# EAGLE board CAM_BOARD_V1_X v17 (EAGLE 9.7.0)
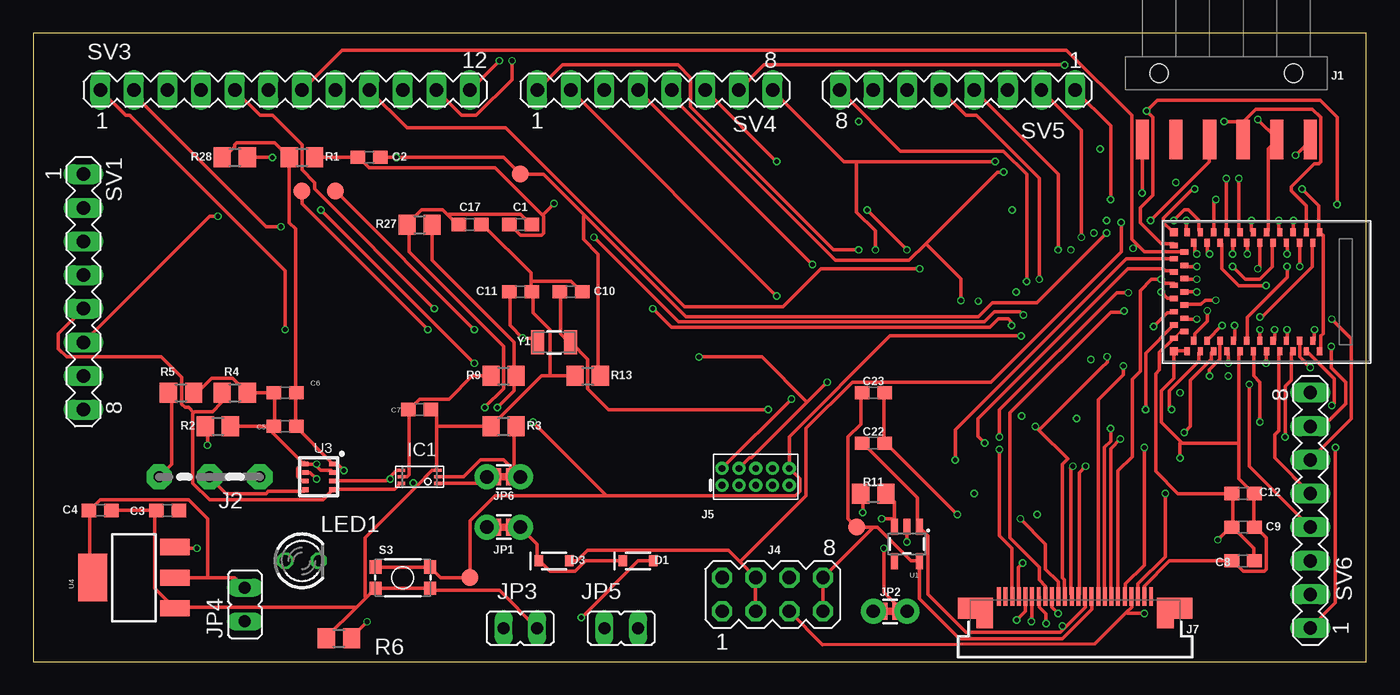
[diagram p0: board, top side]
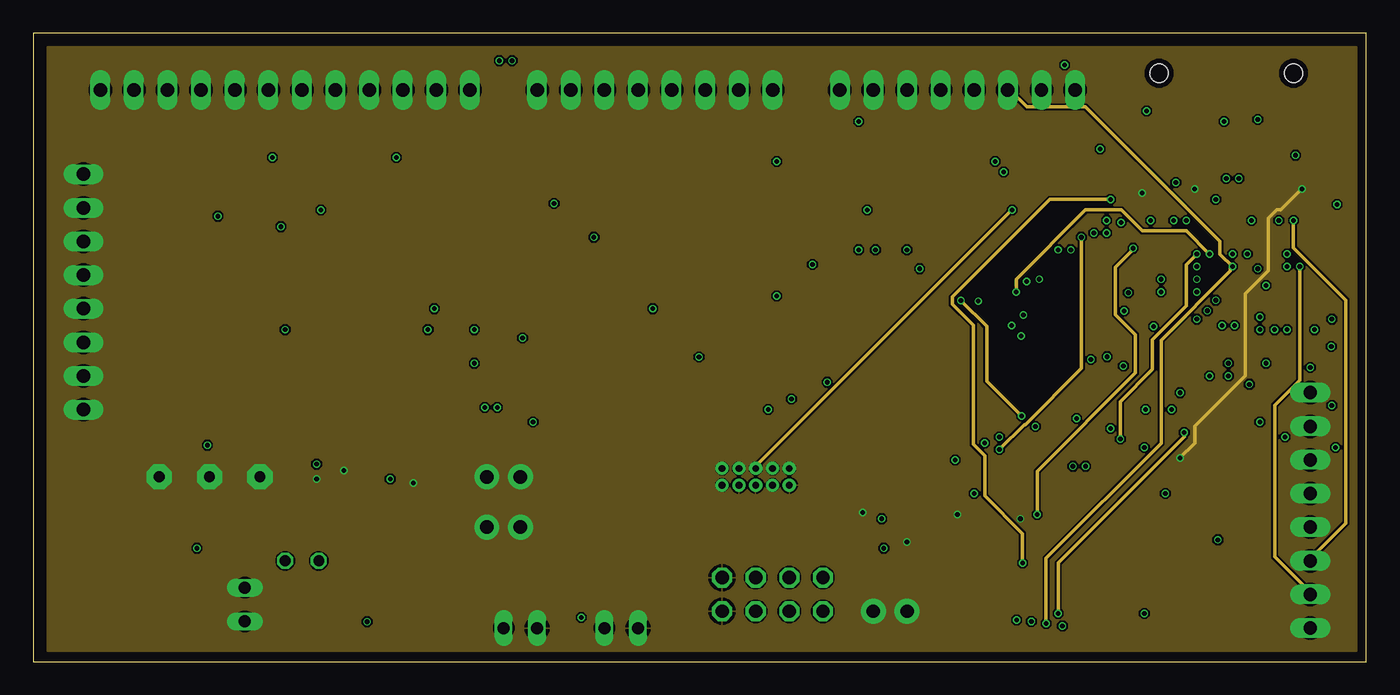
[diagram p1: board, inner layer GND]
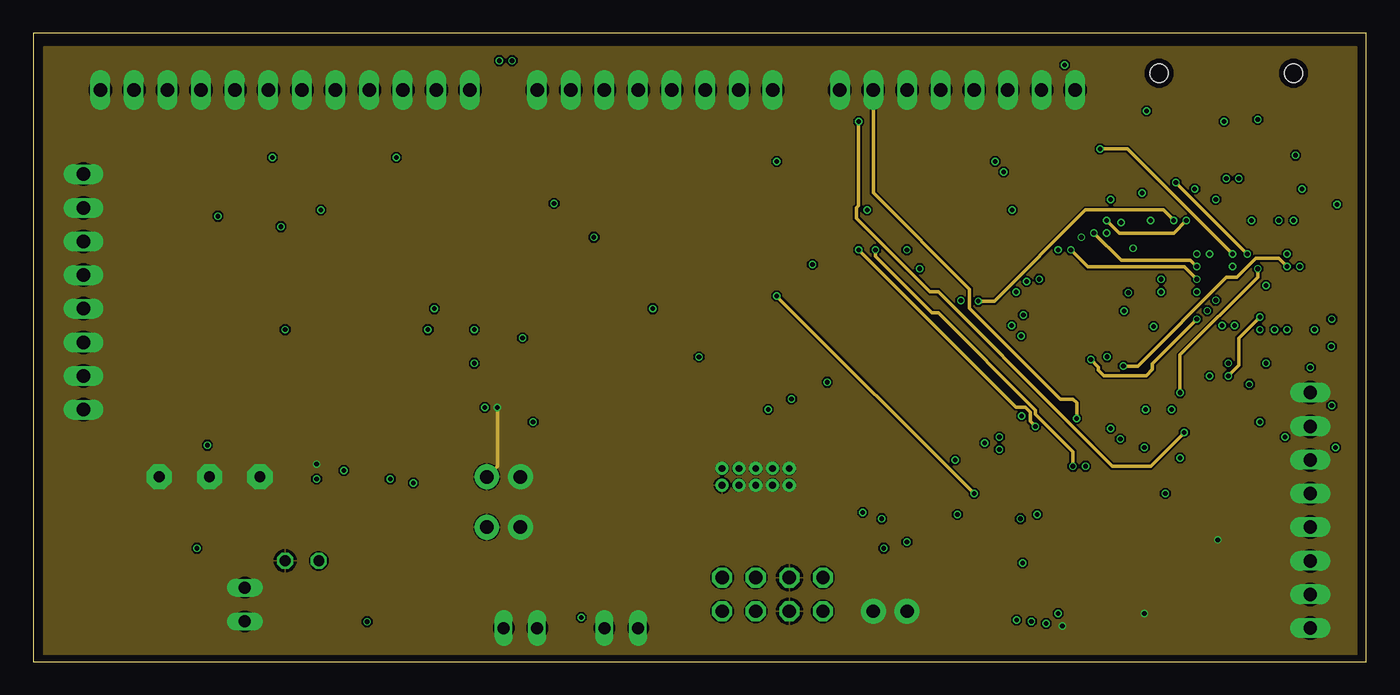
[diagram p2: board, inner layer VDD]
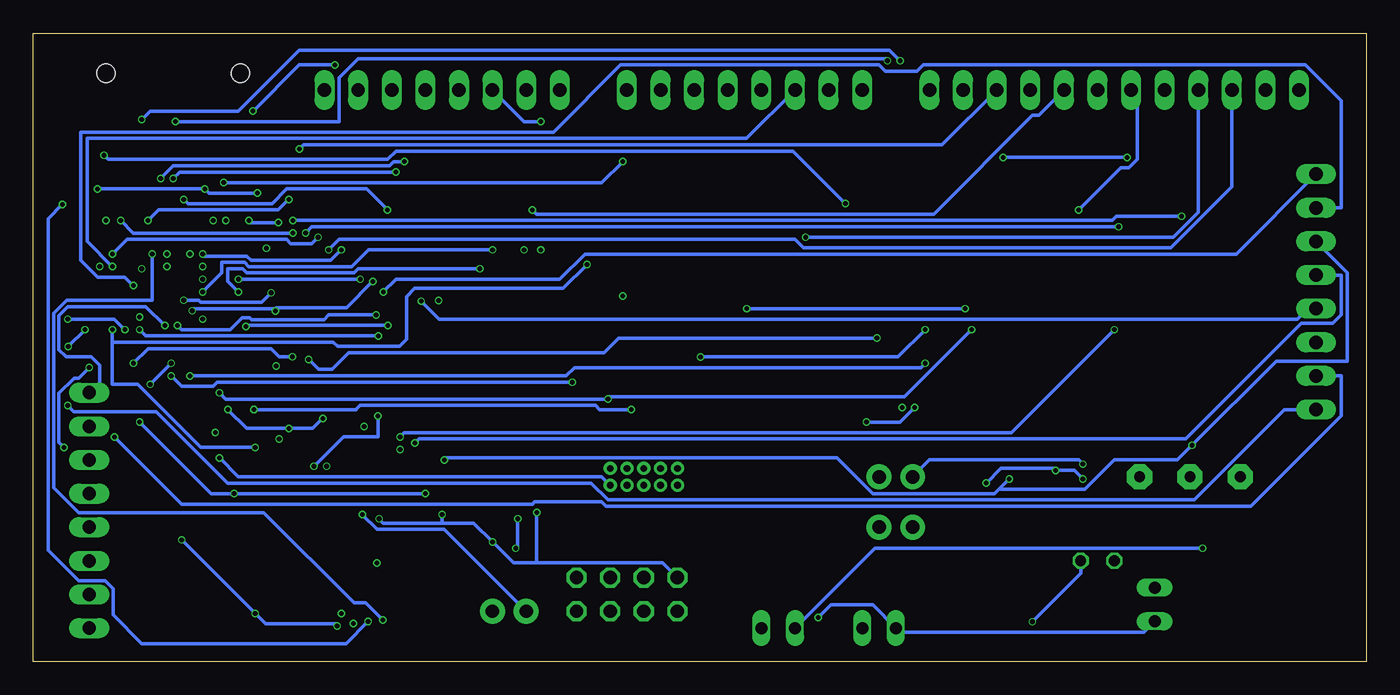
[diagram p3: board, bottom side, seen from below]

Size 100.76 x 47.49 mm. Coordinates in mm from the lower left corner, seen from the top.
Outline: 0,0 100.76,0 100.76,47.49 0,47.49 0,0
Copper layers (1*2*15*16): Top / GND / VDD / Bottom
Stack-up Default Layer Stack: Top User Defined 0.035559375mm / Dielectric-2 User Defined 0.17018125mm / GND User Defined 0.01778125mm / Dielectric-1 User Defined 1.1938mm / VDD User Defined 0.01778125mm / Dielectric-3 User Defined 0.17018125mm / Bottom User Defined 0.035559375mm
Design rules "oshpark-4layer": minimum track width 5mil, minimum drill 10mil, track to track 5mil, track to pad 5mil, pad to pad 5mil, via to via 5mil, smd to smd 5mil, copper to edge 15mil, drill to drill 6mil, minimum pad ring 4mil, minimum via ring 4mil, stop-mask expansion 1.5mil, vias tented up to drill 0mil, thermal gap 10mil

## Footprints (pad centres in the part's own frame; a part is rotated, then mirrored left to right if it is on the bottom)
C0603 = smd 1.1 x 1: 1 -0.85,0; 2 0.85,0
SOD-323 = smd 0.63 x 0.83: A 1.15,0; C -1.15,0
WSOF-6 = smd 0.55 x 0.25: 1 -1.375,0.5; 2 -1.375,0; 3 -1.375,-0.5; 4 1.375,-0.5; 5 1.375,0; 6 1.375,0.5
1X06-SMD_RA_MALE = smd 1 x 3: 1 -6.35,5; 2 -3.81,5; 3 -1.27,5; 4 1.27,5; 5 3.81,5; 6 6.35,5 | hole 1.4: -5.08,0; 5.08,0
04C = drill 0.813 pad 1.905 octagon: 1 -1.905,0; 2 1.905,0; 3 5.715,0
MA04-2 = drill 1.016 octagon: 1 -3.81,-1.27; 2 -3.81,1.27; 3 -1.27,-1.27; 4 -1.27,1.27; 5 1.27,-1.27; 6 1.27,1.27; 7 3.81,-1.27; 8 3.81,1.27
2X5-PTH-1.27MM = drill 0.508 pad 1: 1 -2.54,-0.635; 2 -2.54,0.635; 3 -1.27,-0.635; 4 -1.27,0.635; 5 0,-0.635; 6 0,0.635; 7 1.27,-0.635; 8 1.27,0.635; 9 2.54,-0.635; 10 2.54,0.635
FPC-24-AMPHENOL-SFV24R-1STE1HLF = smd 0.3 x 1.4: 1 5.75,2.4; 2 5.25,2.4; 3 4.75,2.4; 4 4.25,2.4; 5 3.75,2.4; 6 3.25,2.4; 7 2.75,2.4; 8 2.25,2.4; 9 1.75,2.4; 10 1.25,2.4; 11 0.75,2.4; 12 0.25,2.4; 13 -0.25,2.4; 14 -0.75,2.4; 15 -1.25,2.4; 16 -1.75,2.4; 17 -2.25,2.4; 18 -2.75,2.4; 19 -3.25,2.4; 20 -3.75,2.4; 21 -4.25,2.4; 22 -4.75,2.4; 23 -5.25,2.4; 24 -5.75,2.4 | smd 1.4 x 1.6: MNT1@0 -8.15,1.5; MNT2@1 8.15,1.5 | smd 1.25 x 2.3: MNT1@1 -6.825,1.15; MNT2@0 6.825,1.15
COMBO-JUMPER_2_NC_TRACE = smd 0.635 x 1.27: 1 -0.508,0; 2 0.508,0 | drill 1.016 pad 1.88: 3 -1.27,0; 4 1.27,0
JP1 = drill 0.914 long: 1 0,-1.27; 2 0,1.27
LED3MM = drill 0.813 octagon: A -1.27,0; K 1.27,0
R0805 = smd 1.3 x 1.5: 1 -0.95,0; 2 0.95,0
TACTILE_SWITCH_SMD_4.6X2.8MM = smd 0.9 x 1: 1 -2.05,-0.8; 2 2.05,-0.8; 3 2.05,0.8; 4 -2.05,0.8
MA08-1 = drill 1.016 long: 1 -8.89,0; 2 -6.35,0; 3 -3.81,0; 4 -1.27,0; 5 1.27,0; 6 3.81,0; 7 6.35,0; 8 8.89,0
MA12-1 = drill 1.016 long: 1 -13.97,0; 2 -11.43,0; 3 -8.89,0; 4 -6.35,0; 5 -3.81,0; 6 -1.27,0; 7 1.27,0; 8 3.81,0; 9 6.35,0; 10 8.89,0; 11 11.43,0; 12 13.97,0
PAD.03X.05 = smd 1.27 x 1.27: P$1 0,0
SOT23-5 = smd 0.55 x 1.2: 1 -0.95,-1.3; 2 0,-1.3; 3 0.95,-1.3; 4 0.95,1.3; 5 -0.95,1.3
ARTEMIS_FP = smd 0.4 x 0.6: AD16 -4,-3.7; BOOT 1.5,4.5; D0 0.5,-4.5; D1 -0.5,-4.5; D2 -1,-3.7; D3 2,-3.7; D7 -1.5,4.5; D8 -0.5,4.5; D9 2,3.7; D10 1,3.7; D14 -5,3.7; D17 -3.5,-4.5; D36 2.5,-4.5; D38 3,-3.7; D40 2.5,4.5; D41 -2.5,-4.5; GND@1 4.5,4.5; GND@39 -5.5,-4.5; GND@47 -1.5,-4.5; GND@59 4.5,-4.5; RXI-0 3.5,4.5; SWDCK 4,3.7; SWDIO 0,3.7; TXO-0 0.5,4.5; ~AD31 -3,-3.7; ~AD35 -2,3.7; ~D4 -2.5,4.5; ~D5 -1,3.7; ~D18 -4.5,-4.5; ~D19 -5,-3.7; ~D22 -3.5,4.5; ~D23 -4,3.7; ~D24 -3,3.7; ~D27 -4.5,4.5; ~D28 -5.5,4.5; ~D37 3.5,-4.5; ~D39 3,3.7; ~D42 1.5,-4.5; ~D43 1,-3.7; ~D44 4,-3.7; ~D45 -2,-3.7; ~RST 0,-3.7 | smd 0.6 x 0.4: AD34 -6.5,-0.5; D15 -6.5,0.5; VDD@36 -5.7,-3; VDD@37 -6.5,-3.5; XI -6.5,-2.5; XO -5.7,-2; ~AD11 -5.7,-1; ~AD12 -5.7,2; ~AD13 -5.7,1; ~AD29 -6.5,-1.5; ~AD32 -5.7,3; ~AD33/SWO -5.7,0; ~D6 -6.5,3.5; ~D25 -6.5,2.5; ~D26 -6.5,1.5 | smd 0.6 x 0.6: GND@22 -6.5,4.5; GND@38 -6.5,-4.5
BME280_LGA = smd 0.5 x 0.35: P$1 1.025,0.975; P$2 1.025,0.325; P$3 1.025,-0.325; P$4 1.025,-0.975; P$5 -1.025,-0.975; P$6 -1.025,-0.325; P$7 -1.025,0.325; P$8 -1.025,0.975
SOT223 = smd 1.219 x 2.235: 1 -2.311,-3.099; 2 0,-3.099; 3 2.311,-3.099 | smd 3.6 x 2.2: 4 0,3.099
CRYSTAL-SMD-3.2X1.5MM = smd 1 x 1.8: P$1 -1.25,0; P$2 1.25,0

## Placement (x,y rotation side)
C1  0.1uF  [C0603]  36.83,33.02 0 top
C2  0.1uF  [C0603]  25.4,38.1 0 top
C3  10uF  [C0603]  10.16,11.43 180 top
C4  10uF  [C0603]  5.08,11.43 0 top
C5  0.1uF  [C0603]  19.05,17.78 0 top
C6  0.1uF  [C0603]  19.05,20.32 0 top
C7  1uF  [C0603]  29.21,19.05 0 top
C8  0.1uF  [C0603]  91.44,7.62 180 top
C9  10uF  [C0603]  91.44,10.16 0 top
C10  15pF  [C0603]  40.64,27.94 0 top
C11  15pF  [C0603]  36.83,27.94 0 top
C12  1.0uF  [C0603]  91.44,12.7 0 top
C17  1nF  [C0603]  33.02,33.02 0 top
C22  1.0uF  [C0603]  63.5,16.51 0 top
C23  1.0uF  [C0603]  63.5,20.32 0 top
D1  1A/23V/620mV  [SOD-323]  45.72,7.62 0 top
D3  1A/23V/620mV  [SOD-323]  39.37,7.62 0 top
IC1  BH1750  [WSOF-6]  29.21,13.97 180 top
J1  [1X06-SMD_RA_MALE]  90.17,44.45 180 top
J2  [04C]  15.24,13.97 180 top
J4  [MA04-2]  55.88,5.08 0 top
J5  CORTEX_DEBUG  [2X5-PTH-1.27MM]  54.61,13.97 0 top
J7  CAMERA-HIMAX BOTTOM-CONTACT  [FPC-24-AMPHENOL-SFV24R-1STE1HLF]  78.74,2.54 0 top
JP1  JUMPER  [COMBO-JUMPER_2_NC_TRACE]  35.56,10.16 180 top
JP2  JUMPER  [COMBO-JUMPER_2_NC_TRACE]  64.77,3.81 0 top
JP3  [JP1]  36.83,2.54 90 top
JP4  [JP1]  16,4.32 0 top
JP5  [JP1]  44.45,2.54 90 top
JP6  JUMPER  [COMBO-JUMPER_2_NC_TRACE]  35.56,13.97 180 top
LED1  [LED3MM]  20.32,7.62 0 top
R1  100k  [R0805]  20.32,38.1 0 top
R2  4.7k  [R0805]  13.97,17.78 0 top
R3  10k  [R0805]  35.56,17.78 0 top
R4  4.7k  [R0805]  15.24,20.32 0 top
R5  4.7k  [R0805]  11.18,20.32 0 top
R6  10k  [R0805]  23.11,1.78 0 top
R9  1k  [R0805]  35.56,21.59 0 top
R11  100k  [R0805]  63.5,12.7 0 top
R13  10k  [R0805]  41.91,21.59 0 top
R27  100k  [R0805]  29.21,33.02 0 top
R28  220k  [R0805]  15.24,38.1 0 top
S3  RESET  [TACTILE_SWITCH_SMD_4.6X2.8MM]  27.94,6.35 0 top
SV1  [MA08-1]  3.81,27.94 270 top
SV3  [MA12-1]  19.05,43.18 0 top
SV4  [MA08-1]  46.99,43.18 0 top
SV5  [MA08-1]  69.85,43.18 180 top
SV6  [MA08-1]  96.52,11.43 90 top
TP1  [PAD.03X.05]  22.86,35.56 0 top
TP2  [PAD.03X.05]  20.32,35.56 0 top
TP4  TEST-POINT3X5  [PAD.03X.05]  36.83,36.83 0 top
TP6  TEST-POINT3X5  [PAD.03X.05]  33.02,6.35 0 top
TP7  TEST-POINT3X5  [PAD.03X.05]  62.23,10.16 0 top
U1  1.8V  [SOT23-5]  66.04,8.89 180 top
U2  ARTEMIS_MODULESMD  [ARTEMIS_FP]  92.71,27.94 0 top
U3  BME280  [BME280_LGA]  21.59,13.97 0 top
U4  LM1117-3.3  [SOT223]  7.62,6.35 90 top
Y1  32.768kHz  [CRYSTAL-SMD-3.2X1.5MM]  39.37,24.13 0 top

## Library data of the parts
C1-C12 C17 C22 C23 = rcl; SPICEPREFIX: C
D1 D3 = SparkFun-DiscreteSemi; PROD_ID: DIO-11623
IC1 = microbuilder
J1 = SparkFun-Connectors; PROD_ID: CONN-08971
J2 JP3-JP5 = jumper
J4 SV1 SV3-SV6 = con-lstb; OC_FARNELL: unknown; OC_NEWARK: unknown
J5 TP1 TP2 TP4 TP6 TP7 = SparkFun-Connectors
J7 = SparkFun-Connectors; DIGIKEY: 609-4320-2-ND; PROD_ID: CONN-14233
JP1 JP2 JP6 = SparkFun-Jumpers
LED1 = led
R1-R6 R9 R11 R13 R27 R28 = rcl; SPICEPREFIX: R
S3 = SparkFun-Switches; PROD_ID: SWCH-13065
U1 = SparkFun-IC-Power; PROD_ID: VREG-14239
U2 = SparkFun-IC-Microcontroller; PROD_ID: SUB-14479
U3 = BME280ComponentLibrary; PROD_ID: IC-13090
U4 = SparkFun-IC-Power; PROD_ID: VREG-08170
Y1 = SparkFun-Clocks; PROD_ID: XTAL-13062

## Nets
1.8V: C23.1 J4.7 J4.8 J7.10 TP7.P$1 U1.5
!DTR: C1.1 C2.1 J1.1 R1.2
!TGT_RST: C1.2 C17.1 J5.10 R27.1 S3.3 S3.4 TP6.P$1 U2.~RST
+5V: JP5.2 U4.3
CAMERA_D0: J7.14 SV4.1 U2.D0
CAMERA_D1: J7.3 SV4.2 U2.D1
CAMERA_D2: J7.9 SV4.3 U2.D2
CAMERA_D3: J7.5 SV4.4 U2.D3
CAMERA_D4: J7.12 SV4.5 U2.~D4
CAMERA_D5: J7.20 SV4.6 U2.~D5
CAMERA_D6: J7.19 SV4.7 U2.~D6
CAMERA_D7: J7.13 SV4.8 U2.D7
CAMERA_DVDD_EN: JP2.1 JP2.3 SV3.7 U2.~AD32
CAMERA_HSYNC: J7.16 SV5.6 U2.D17
CAMERA_INT: J7.18 SV5.3 U2.D10
CAMERA_MCLK: J7.8 SV5.7 U2.~D18
CAMERA_PCLK: J7.17 SV5.8 U2.~D19
CAMERA_TRIG: J7.7 SV5.4 U2.D14
CAMERA_VSYNC: J7.6 SV5.5 U2.D15
D13: SV3.3 U2.~AD13
D16: SV3.4 U2.AD16
D23: SV1.1 U2.~D23
D24: SV1.2 U2.~D24
D26: SV1.4 U2.~D26
D28: SV1.6 U2.~D28
D29: SV3.5 U2.~AD29
D31: SV3.6 U2.~AD31
D33: SV3.8 U2.~AD33/SWO
D34: SV3.9 U2.AD34
D35: SV3.10 U2.~AD35
D36: SV1.7 U2.D36
D37: SV1.8 U2.~D37
D38: SV6.1 U2.D38
D39: SV6.2 U2.~D39
D40: SV6.3 U2.D40
D41: SV6.4 U2.D41
D42: SV6.5 U2.~D42
D43: SV6.6 U2.~D43
D44: SV6.7 U2.~D44
D45: SV6.8 U2.~D45
FTDI_VCC: D3.A J1.4 J4.3 J4.4
GND: C3.2 C4.2 C5.2 C6.2 C7.2 C8.2 C9.2 C10.2 C11.2 C12.2 C17.2 C22.2 C23.2 IC1.3 J1.6 J4.1 J4.2 J5.3 J5.5 J5.9 J7.2 J7.15 JP3.1 JP5.1 R1.1 R3.1 R6.1 R11.1 R13.1 R28.1 S3.1 S3.2 U1.2 U2.GND@1 U2.GND@22 U2.GND@38 U2.GND@39 U2.GND@47 U2.GND@59 U3.P$1 U3.P$7 U4.1
N$1: JP2.2 JP2.4 R11.2 U1.3
N$2: C7.1 IC1.5 R9.1
N$3: IC1.2 JP6.1 JP6.3 R3.2
N$4: C4.1 JP4.2 U4.2 U4.4
N$5: J2.3 R5.1
N$7: J2.2 U3.P$5
N$8: C3.1
N$9: LED1.K R6.2
N$14: C10.1 U2.XI Y1.P$2
N$15: C11.1 U2.XO Y1.P$1
PDM_CLK: SV3.2 U2.~AD12
PDM_DATA: SV3.1 U2.~AD11
SCL: J7.21 SV5.1 U2.D8
SCL1: J2.1
SCL2: IC1.6 R4.1 SV1.5 U2.~D27 U3.P$4
SDA: J7.22 SV5.2 U2.D9
SDA2: IC1.4 R2.1 SV1.3 U2.~D25 U3.P$3
TGT_BOOT: C2.2 R13.2 R28.2 TP4.P$1 U2.BOOT
TGT_SWCLK: J5.4 TP1.P$1 U2.SWDCK
TGT_SWDIO: J5.2 TP2.P$1 U2.SWDIO
TGT_SWO: J5.6 U2.~D22
UART-RX: J1.3 SV3.11 U2.RXI-0
UART-TX: J1.2 SV3.12 U2.TXO-0
V_BATT: D1.A JP3.2 JP4.1
VDD: C5.1 C6.1 C8.1 C9.1 C12.1 C22.1 IC1.1 J4.5 J4.6 J5.1 J7.4 J7.11 JP1.2 JP1.4 JP6.2 JP6.4 LED1.A R2.2 R4.2 R5.2 R9.2 R27.2 U1.1 U2.VDD@36 U2.VDD@37 U3.P$2 U3.P$6 U3.P$8
VIN1: D1.C D3.C JP1.1 JP1.3

## Tracks (layer width: path | path; a pad name or v marks a point on that pad's centre or on a via)
1.8V
  Top 0.254: J4.7 J4.8 63.5,10.16 | C23.1 62.55,20.32 62.55,17.94 61.59,16.99 61.59,10.79 TP7.P$1 63.5,10.16 | 63.5,10.16 63.82,10.16 66.36,7.62 66.83,7.62 U1.5 66.99,7.46 66.99,4.76 70.01,1.75 77.79,1.75 80.01,3.97 80.01,4.92 J7.10
!DTR  (via drill 0.35)
  Top 0.254: R1.2 C2.1 24.61,38.1 25.4,37.31 34.92,37.31 38.5,33.73 | 38.5,33.73 38.58,33.66 38.58,32.38 38.42,32.23 36.83,32.23 36.04,33.02 C1.1 | v95.41,38.26 96.52,39.37 J1.1 | 38.5,33.73 v39.37,34.61
  Bottom 0.254: v95.41,38.26 95.09,37.94 73.98,37.94 73.34,38.58 43.34,38.58 v39.37,34.61
!TGT_RST  (via drill 0.35)
  Top 0.254: 31.35,33.73 30.96,34.13 29.37,34.13 R27.1 28.42,33.02 28.42,30.96 35.56,23.81 35.56,20.64 v34.13,19.21 | 31.35,33.73 32.07,33.02 C17.1 | C1.2 37.62,33.02 36.83,33.81 31.43,33.81 31.35,33.73 | S3.4 26.04,7.14 29.84,7.14 S3.3 30,7.14 30.8,6.35 TP6.P$1 33.02,10.64 34.92,12.54 43.34,12.54 | v92.71,25.08 U2.~RST | v74.68,24.61 64.77,24.61 57.15,16.99 J5.10 57.94,13.81 57.94,12.86 57.63,12.54 43.34,12.54 | 43.34,12.54 v37.78,18.1
  Bottom 0.254: v92.71,25.08 92.23,24.61 v74.68,24.61 | v34.13,19.21 35.24,18.1 v37.78,18.1
+5V  (via drill 0.35)
  Top 0.254: v12.38,8.57 10.79,8.57 U4.3
  Bottom 0.254: v12.38,8.57 37.15,8.57 JP5.2
CAMERA_D0  (via drill 0.35)
  Top 0.254: v93.19,22.54 93.19,23.34 U2.D0 | 76.03,17.48 80.33,21.78 80.74,22.2 81.17,22.63 v81.17,23.04 | J7.14 77.95,5.08 77.95,6.19 77.79,6.35 77.79,14.92 78.18,15.32 76.03,17.48 | SV4.1 40.01,45.09 48.74,45.09 49.69,44.13 49.69,41.91 60.48,31.11 v62.39,31.11 | 76.03,17.48 v75.74,17.76
  VDD 0.254: v75.74,17.76 75.36,18.15 75.36,18.85 74.97,19.23 74.27,19.23 v62.39,31.11
  Bottom 0.254: v93.19,22.54 92.08,23.65 82.78,23.65 82.17,23.04 v81.17,23.04
CAMERA_D1  (via drill 0.35)
  Top 0.254: v92.71,18.1 92.71,21.11 92.23,21.59 92.23,23.34 U2.D1 | v85.57,12.7 85.57,7.94 83.5,5.87 83.5,5.08 J7.3 | v56.2,27.62 SV4.2
  VDD 0.254: v71.12,12.7 v56.2,27.62
  Bottom 0.254: v92.71,18.1 87.31,12.7 v85.57,12.7 v71.12,12.7
CAMERA_D2  (via drill 0.35)
  Top 0.254: v94.77,29.84 94.77,29.05 91.76,26.04 91.76,24.29 U2.D2 | J7.9 80.49,5.08 80.49,19.78 82.4,21.69 v82.4,22.34
  VDD 0.254: v94.77,29.84 94.14,30.48 92.39,30.48 90.96,29.05 90.19,29.05 83.48,22.34 v82.4,22.34
  Bottom 0.254: v94.77,29.84 96.68,31.75 96.68,39.53 46.83,39.53 SV4.3
CAMERA_D3  (via drill 0.35)
  Top 0.254: v94.77,25.08 94.77,24.29 U2.D3 | v83.98,16.19 83.98,7.3 82.55,5.87 82.55,5.08 J7.5 | v58.9,30 SV4.4
  Bottom 0.254: 94.77,24.13 94.77,20.95 92.87,20.95 88.11,16.19 v83.98,16.19 | 94.77,24.13 v94.77,25.08 | v58.9,30 60.71,28.19 71.91,28.19 72.53,27.58 72.53,24.37 73.08,23.81 77.76,23.81 78.07,24.13 94.77,24.13
CAMERA_D4  (via drill 0.35)
  Top 0.254: v90.17,36.51 90.17,32.54 U2.~D4 | v73.34,36.99 72.87,36.99 67.47,31.59 | 67.47,31.59 66.2,30.32 60.64,30.32 48.26,42.7 SV4.5 | v79.53,14.76 79.06,14.29 79.06,5.08 J7.12 | 67.47,31.59 70.12,28.94 v70.12,27.28
  GND 0.254: v70.12,27.28 72.07,25.33 72.07,21.2 v74.7,18.57
  Bottom 0.254: v90.17,36.51 89.69,36.99 v73.34,36.99 | v79.53,14.76 77.31,16.99 74.7,16.99 v74.7,18.57
CAMERA_D5  (via drill 0.35)
  Top 0.254: v91.76,30.8 91.76,31.59 U2.~D5 | v56.2,37.78 SV4.6 | J7.20 74.99,3.81 v74.33,3.14
  VDD 0.254: v91.76,30.8 v86.36,36.2
  Bottom 0.254: v91.76,30.8 91.76,27.3 98.22,27.3 99.21,26.32 99.21,13.16 97.33,11.27 83.34,11.27 76.52,4.45 75.63,4.45 v74.33,3.14 | v56.2,37.78 57.78,36.2 v86.36,36.2
CAMERA_D6  (via drill 0.35)
  Top 0.254: v77.95,45.09 55.24,45.09 SV4.7 | U2.~D6 86.2,31.59 85.25,31.59 83.66,33.18 83.66,34.29 84.61,35.24 84.61,41.12 v84.14,41.59 84.96,42.42 97.28,42.42 98.55,41.15 v98.55,34.54 | J7.19 75.49,3.35 75.44,3.3 v75.44,3.05
  Bottom 0.254: v84.14,41.59 80.64,45.09 v77.95,45.09 | v75.44,3.05 77.11,1.38 92.56,1.38 94.72,3.53 94.72,5.51 95.33,6.12 97.31,6.12 99.62,8.43 99.62,33.48 v98.55,34.54
CAMERA_D7  (via drill 0.35)
  Top 0.254: v91.12,36.51 91.12,32.54 U2.D7 | 62.23,37.78 61.28,37.78 SV4.8 | 62.23,37.78 v72.71,37.78 | v78.58,14.76 78.42,14.61 78.42,5.08 J7.13 | v63.66,31.11 63.66,32.54 62.23,33.97 62.23,37.78
  VDD 0.254: v78.58,14.76 78.58,15.88 75.76,18.69 75.76,19.01 68.42,26.35 67.94,26.35 63.66,30.64 v63.66,31.11
  Bottom 0.254: v91.12,36.51 90.17,37.47 73.82,37.47 73.5,37.78 v72.71,37.78
CAMERA_DVDD_EN  (via drill 0.35)
  Top 0.254: JP2.3 JP2.1 | 83.47,31.46 83.03,31.91 83.03,41.27 78.11,46.2 23.34,46.2 SV3.7 | 83.47,31.46 83.24,31.23 v83.12,31.23 | U2.~AD32 86.99,30.96 83.98,30.96 83.47,31.46
  GND 0.254: v83.12,31.23 83.12,31.11 81.8,29.79 81.8,26.22 83.31,24.7 83.31,21.81 75.88,14.39 v75.88,11.11
  Bottom 0.254: JP2.3 69.69,10 74.77,10 v75.88,11.11
CAMERA_HSYNC  (via drill 0.35)
  Top 0.254: v87,17.3 87.47,17.78 87.47,21.27 89.06,22.86 89.06,23.34 U2.D17 | v77.47,3.65 76.99,4.13 76.99,4.92 J7.16
  GND 0.254: v87,17.3 87,16.99 77.47,7.46 v77.47,3.65
  VDD 0.254: v62.39,40.8 62.39,34.45 62.23,34.29 62.23,33.5 67.79,27.94 68.4,27.94 78.21,18.13 78.21,18.11 81.56,14.76 84.45,14.76 v87,17.3
  Bottom 0.254: SV5.6 63.66,40.8 v62.39,40.8
CAMERA_INT  (via drill 0.35)
  Top 0.254: v90.65,29.84 91.6,28.89 92.71,28.89 93.66,29.84 93.66,31.59 U2.D10 | v76.55,2.89 76.55,3.64 76.06,4.13 76.06,4.87 J7.18
  GND 0.254: SV5.3 73.82,43.18 75.09,41.91 79.53,41.91 89.69,31.75 89.69,30.8 v90.65,29.84 90.49,29.84 90.49,29.53 85.25,24.29 85.25,16.51 76.55,7.81 v76.55,2.89
CAMERA_MCLK  (via drill 0.35)
  Top 0.254: v86.04,19.05 85.88,19.21 85.88,20.48 88.11,22.7 88.11,23.34 U2.~D18 | J7.8 80.96,5.08 80.96,16.2 81.44,16.67 v81.44,17.62
  VDD 0.254: v78.87,18.38 78.87,19.56 78.58,19.84 77.64,19.84 70.78,26.71 70.78,28.14 63.5,35.41 SV5.7
  Bottom 0.254: v86.04,19.05 84.61,17.62 v81.44,17.62 79.63,17.62 v78.87,18.38
CAMERA_PCLK  (via drill 0.35)
  Top 0.254: v88.74,26.51 88.74,25.72 87.79,24.77 87.79,24.29 U2.~D19 | J7.17 76.52,5.08 76.52,5.71 76.04,6.19 76.04,7.14 73.82,9.37 73.82,18.8 81.44,26.42 82.38,26.42 v82.45,26.49 | SV5.8 65.56,38.58 73.34,38.58 75.09,36.83 v75.09,28.73
  Bottom 0.254: v88.74,26.51 88.58,26.67 82.45,26.67 | v82.45,26.49 82.45,26.67 | 82.45,26.67 82.39,26.74 77.08,26.74 v75.09,28.73
CAMERA_TRIG  (via drill 0.35)
  Top 0.254: v87.95,30.8 87.79,30.96 87.79,31.59 U2.D14 | v77.47,31.11 77.47,36.83 SV5.4 | v82.17,16.83 81.44,16.1 81.44,5.08 J7.7
  GND 0.254: v87.95,30.8 87.15,30 87.15,26.87 84.59,24.32 84.59,22.08 82.17,19.65 v82.17,16.83
  Bottom 0.254: v87.95,30.8 87.79,30.64 84.61,30.64 84.3,30.32 78.26,30.32 v77.47,31.11
CAMERA_VSYNC  (via drill 0.35)
  Top 0.254: v76.04,28.89 76.04,36.51 71.28,41.27 70.48,41.27 SV5.5 | U2.D15 86.2,28.57 85.57,28.57 v85.25,28.89 84.52,28.89 83.67,28.04 83.67,21.95 83.06,21.34 83.06,15.49 81.99,14.43 J7.6
  Bottom 0.254: v76.04,28.89 v85.25,28.89
D13  (via drill 0.35)
  Top 0.254: v87.95,28.89 87.15,28.89 U2.~AD13
  VDD 0.254: v87.95,28.89 87,29.84 79.69,29.84 v78.42,31.11
  Bottom 0.254: v78.42,31.11 77.63,31.91 43.18,31.91 42.55,31.27 14.76,31.27 10.16,35.88 SV3.3
D16  (via drill 0.35)
  Top 0.254: v89.85,25.4 88.74,24.29 U2.AD16 | v74.83,26.19 74.58,26.45 72.66,26.45 71.87,25.66 48.79,25.66 v42.39,32.07
  Bottom 0.254: v89.85,25.4 89.53,25.08 85.88,25.08 85.58,25.38 84.98,25.99 84.41,25.99 84.25,25.83 78.78,25.83 78.42,26.19 v74.83,26.19 | v42.39,32.07 14.61,32.07 12.7,33.97 SV3.4
D23  (via drill 0.35)
  Top 0.254: v88.9,30.8 88.74,30.96 88.74,31.59 U2.~D23
  GND 0.254: v88.9,30.8 87.15,32.54 83.82,32.54 82.23,34.13 79.53,34.13 74.3,28.89 v74.3,27.94
  Bottom 0.254: v74.3,27.94 73.34,28.89 60.96,28.89 59.05,30.8 9.84,30.8 SV1.1
D24  (via drill 0.35)
  Top 0.254: v93.19,28.42 91.12,28.42 89.85,29.69 89.85,31.59 U2.~D24
  Bottom 0.254: v93.19,28.42 93.82,29.05 95.89,29.05 97.16,30.32 97.16,40.01 61.44,40.01 56.36,45.09 36.83,45.09 36.35,44.61 33.97,44.61 33.5,45.09 4.6,45.09 1.91,42.39 1.91,34.29 SV1.2
D26  (via drill 0.35)
  Top 0.254: v71.91,16.51 71.41,17.02 71.41,18.35 82.74,29.69 85.41,29.69 85.57,29.53 86.2,29.53 U2.~D26
  Bottom 0.254: v71.91,16.51 71.6,16.83 13.65,16.83 4.92,25.56 2.54,25.56 1.91,26.19 1.91,29.21 SV1.4
D28  (via drill 0.35)
  Top 0.254: v87.15,33.34 87.15,32.54 U2.~D28 | v13.97,33.66 13.34,33.66 SV1.6
  VDD 0.254: v87.15,33.34 86.2,32.38 82.07,32.38 v81.12,33.34
  Bottom 0.254: v81.12,33.34 19.21,33.34 18.89,33.66 v13.97,33.66
D29  (via drill 0.35)
  Top 0.254: v30.32,26.67 21.27,35.72 21.27,36.2 20.32,37.15 20.32,39.05 18.1,41.27 17.14,41.27 SV3.5 | U2.~AD29 86.2,26.35 85.7,26.35 v84.68,25.33 | v73.95,25.4 73.95,25.65 73.69,25.91 72.94,25.91 72.3,25.26 48.24,25.26 v46.83,26.67
  Bottom 0.254: v73.95,25.4 84.61,25.4 v84.68,25.33 | v30.32,26.67 v46.83,26.67
D31  (via drill 0.35)
  Top 0.254: v88.9,21.59 88.9,22.07 89.69,22.86 89.69,24.13 U2.~AD31 | v21.75,34.13 v33.34,22.54
  Bottom 0.254: v88.9,21.59 60.48,21.59 59.85,22.23 33.66,22.23 v33.34,22.54 | v21.75,34.13 18.57,37.31 17.94,37.31 17.3,37.94 17.3,43.18 SV3.6
D33  (via drill 0.35)
  Top 0.254: v87.95,27.94 U2.~AD33/SWO | v63.02,34.13 v66.04,31.11
  Bottom 0.254: v87.95,27.94 86.52,29.37 86.52,30.16 84.77,30.16 84.45,29.84 76.68,29.84 75.41,31.11 v66.04,31.11 | v63.02,34.13 62.71,33.81 32.7,33.81 25.24,41.27 24.77,41.27 SV3.8
D34  (via drill 0.35)
  Top 0.254: v85.25,27.94 85.72,27.46 86.2,27.46 U2.AD34 | v66.99,29.69 59.53,29.69 56.67,26.83 49.21,26.83 35.72,40.32 28.26,40.32 SV3.9
  Bottom 0.254: v85.25,27.94 86.04,28.73 86.04,29.69 84.93,29.69 84.61,29.37 76.52,29.37 76.2,29.69 v66.99,29.69
D35  (via drill 0.35)
  Top 0.254: v90.65,30.8 90.65,31.59 U2.~AD35
  VDD 0.254: v90.65,30.8 82.71,38.73 v80.64,38.73
  Bottom 0.254: v80.64,38.73 80.33,39.05 32.07,39.05 SV3.10
D36  (via drill 0.35)
  Top 0.254: v94.61,16.99 94.61,20.8 95.09,21.27 95.09,23.34 U2.D36
  Bottom 0.254: v94.61,16.99 89.53,11.91 63.02,11.91 62.87,12.06 57.78,12.06 57.47,11.75 8.73,11.75 1.91,18.57 1.91,21.59 SV1.7
D37  (via drill 0.35)
  Top 0.254: U2.~D37 96.36,23.34 98.32,21.37 98.32,19.53 v98.15,19.36
  Bottom 0.254: SV1.8 6.19,19.05 13.02,12.22 57.31,12.22 58.58,13.49 86.04,13.49 91.44,18.89 97.68,18.89 v98.15,19.36
D38  (via drill 0.35)
  Top 0.254: v96.52,22.23 95.73,23.02 95.73,24.13 U2.D38 | v98.42,16.19 98.42,4.45 SV6.1
  Bottom 0.254: v96.52,22.23 97.31,21.43 97.64,21.43 98.81,20.27 98.81,16.57 v98.42,16.19
D39  (via drill 0.35)
  Top 0.254: v95.73,29.84 95.73,31.59 U2.~D39
  GND 0.254: v95.73,29.84 95.73,21.27 93.82,19.37 93.82,7.94 96.52,5.24 SV6.2
D40  (via drill 0.35)
  Top 0.254: v95.25,33.34 95.25,32.54 U2.D40
  GND 0.254: v95.25,33.34 95.25,31.27 99.22,27.3 99.22,10.48 96.52,7.78 SV6.3
D41  (via drill 0.35)
  Top 0.254: v90.33,22.54 90.33,23.34 U2.D41 | v91.92,20.95 91.92,14.76 SV6.4
  Bottom 0.254: v91.92,20.95 v90.33,22.54
D42
  Top 0.254: SV6.5 93.82,15.4 93.82,17.14 94.14,17.46 94.14,23.34 U2.~D42
D43  (via drill 0.35)
  Top 0.254: v93.82,25.08 93.82,24.29 U2.~D43 | SV6.6 99.62,18.34 99.62,24.41 v98.15,25.88
  Bottom 0.254: v93.82,25.08 94.61,25.88 v98.15,25.88
D44  (via drill 0.35)
  Top 0.254: v96.84,25.08 96.84,24.29 U2.~D44 | v98.11,23.81 98.11,22.23 99.21,21.12 99.21,19.49 97.5,17.78 SV6.7
  Bottom 0.254: v96.84,25.08 v98.11,23.81
D45  (via drill 0.35)
  Top 0.254: v90.81,25.4 90.81,24.29 U2.~D45
  Bottom 0.254: v90.81,25.4 92.23,26.83 98.13,26.83 98.81,26.15 98.81,23.58 98.24,23.02 96.36,23.02 95.73,22.38 95.73,20.32 SV6.8
FTDI_VCC  (via drill 0.35)
  Top 0.254: D3.A 41.12,7.62 41.91,8.41 52.55,8.41 53.42,7.54 | 53.42,7.54 J4.4 J4.3 | J1.4 88.9,37.78 v84.45,33.34 | v82.23,33.18 82.23,30.96 72.39,21.11 61.91,21.11 58.42,17.62 58.42,12.54 53.42,7.54
  Bottom 0.254: v84.45,33.34 84.3,33.18 v82.23,33.18
GND  (via drill 0.35)
  Top 0.254: R1.1 18.26,39.21 15.4,39.21 15.24,39.05 15.24,38.89 14.45,38.1 R28.1 | v21.43,13.81 20.95,14.29 20.64,14.29 U3.P$7 | v23.5,14.45 23.02,14.92 22.7,14.92 U3.P$1 22.54,15.08 19.84,17.78 | 19.84,20.32 19.84,17.78 | 19.84,17.78 C5.2 | R1.1 19.37,33.18 19.84,32.7 19.84,20.32 | R1.1 | 19.84,20.32 C6.2 | U2.GND@59 97.31,23.5 97.31,24.61 97.5,24.79 97.5,25.6 97.49,25.6 97.49,32.21 97.31,32.38 U2.GND@1 97.16,32.54 97.16,34.45 v95.89,35.72 | v87.79,35.72 87.63,35.72 85.41,33.5 85.41,33.18 86.04,32.54 86.2,32.54 U2.GND@22 | J1.6 v83.82,35.4 | 37.62,28.73 37.62,29.37 33.97,33.02 C17.2 | 37.62,28.73 37.62,27.94 C11.2 37.78,27.94 37.78,26.35 39.05,25.08 39.05,21.59 | 37.62,28.73 40.64,28.73 41.43,27.94 C10.2 | 30.48,17.78 30.48,18.73 30.16,19.05 C7.2 | 30.48,17.78 30.48,14.45 | 30.48,17.78 R3.1 | 39.05,21.59 38.42,21.59 R3.1 | 39.05,21.59 R13.1 | R3.1 | J7.2 83.98,5.08 83.98,5.71 85.88,7.62 C8.2 90.65,7.62 91.44,6.83 93.03,6.83 93.19,6.99 93.19,9.37 92.39,10.16 C9.2 92.23,10.16 92.23,12.7 | U2.GND@39 87.15,23.5 86.36,23.5 U2.GND@38 86.2,23.34 86.2,21.43 85.25,20.48 85.25,18.1 86.76,16.59 | 91.12,16.51 91.12,13.81 92.23,12.7 | 91.12,16.51 91.12,23.34 U2.GND@47 | 86.76,16.59 86.84,16.51 91.12,16.51 | 92.23,12.7 C12.2 | 9.21,11.43 C4.2 | 9.21,11.43 9.21,5.56 10.64,4.13 U4.1 10.79,4.13 24.29,4.13 24.37,4.05 | 9.21,11.43 C3.2 | 25.16,4.84 25.88,5.56 S3.1 26.04,5.56 29.84,5.56 S3.2 30,5.4 35.24,5.4 JP3.1 | 25.16,4.84 24.37,4.05 | 24.37,4.05 22.23,1.91 R6.1 | C23.2 64.29,20.32 64.29,16.51 C22.2 64.45,16.51 v69.85,11.11 | v66.04,9.05 U1.2 | v74.61,10.79 76.52,8.89 76.52,6.99 77.47,6.03 77.47,5.08 J7.15
  Top 0.254: v62.71,11.27 62.71,12.7 R11.1 | v86.68,15.4 86.68,16.51 86.76,16.59 | 30.48,14.45 30.16,14.45 28.97,13.26 | 28.97,13.26 25.08,9.37 25.08,4.92 25.16,4.84 | 30.48,14.45 IC1.3 | 28.97,13.26 v28.73,13.49
  GND 0.254: v95.89,35.72 94.3,34.13 93.98,34.13 93.34,33.5 93.34,29.53 91.6,27.78 91.6,21.59 87.79,17.78 87.79,16.51 v86.68,15.4
  Bottom 0.254: v21.43,13.81 22.07,14.45 v23.5,14.45 23.65,14.61 27.62,14.61 v28.73,13.49 | v83.82,35.4 87.47,35.4 v87.79,35.72 v95.89,35.72 | 62.71,7.46 53.18,7.46 J4.2 | 62.71,7.46 64.45,7.46 v66.04,9.05 67.47,10.48 69.85,10.48 | v74.61,10.79 74.3,10.48 69.85,10.48 | 62.71,7.46 v62.71,11.27 | 69.85,10.48 v69.85,11.11 | v86.68,15.4 85.25,13.97 57.78,13.97 J5.9
  pour GND: 1.02,46.48 100.08,46.48 100.08,0.76 1.02,0.76
N$1  (via drill 0.35)
  Top 0.254: 65.09,10.79 65.09,12.06 R11.2 | 65.09,10.79 65.09,10.32 U1.3 | 65.72,3.81 JP2.2 | v64.14,10.79 65.09,10.79 | v64.29,8.57 64.29,5.24 65.72,3.81 | 65.72,3.81 JP2.4
  Bottom 0.254: v64.14,10.79 64.14,8.57 v64.29,8.57
N$2
  Top 0.254: IC1.5 28.26,13.97 28.42,14.13 28.42,19.05 | R9.1 33.18,21.59 31.43,19.84 29.21,19.84 28.42,19.05 | 28.42,19.05 C7.1
N$3
  Top 0.254: IC1.2 32.54,13.97 33.81,15.24 35.56,15.24 36.51,14.29 | 36.51,14.29 36.2,13.97 JP6.1 | 36.51,14.29 JP6.3 36.35,14.61 36.35,17.78 R3.2
N$4
  Top 0.254: 13.18,6.35 15.24,6.35 JP4.2 | 13.18,6.35 U4.2 | 4.29,11.43 4.29,6.51 4.45,6.35 U4.4 | 13.18,6.35 13.18,10.79 11.75,12.22 5.08,12.22 4.29,11.43 | 4.29,11.43 C4.1
N$5
  Top 0.254: J2.3 10.48,14.92 10.48,20.32 R5.1
N$7
  Top 0.254: J2.2 14.61,12.7 17.62,12.7 17.78,12.86 20.48,12.86 U3.P$5
N$9  (via drill 0.35)
  Top 0.254: v25.24,3.02 24.13,1.91 R6.2
  Bottom 0.254: v25.24,3.02 21.59,6.67 LED1.K
N$14  (via drill 0.35)
  Top 0.254: v55.56,19.05 43.5,19.05 41.91,20.64 41.91,22.86 40.64,24.13 Y1.P$2 40.48,24.13 39.85,24.77 39.85,27.94 C10.1 | 86.2,25.4 U2.XI 84.07,23.3 v84.07,19.05
  Bottom 0.254: v55.56,19.05 57.94,19.05 58.26,19.37 76.04,19.37 76.28,19.13 76.36,19.05 v84.07,19.05
N$15  (via drill 0.35)
  Top 0.254: v87.95,25.88 87.15,25.88 U2.XO | Y1.P$1 38.1,24.13 37.78,24.45 v36.99,24.45 36.04,25.4 36.04,27.94 C11.1
  VDD 0.254: v87.95,25.88 84.59,22.52 84.59,22.08 84.13,21.62 80.9,21.62 80.52,22 80.52,22.26 v79.94,22.84
  Bottom 0.254: v36.99,24.45 56.52,24.45 57.63,23.34 76.9,23.34 78.16,22.08 79.17,22.08 v79.94,22.84
PDM_CLK  (via drill 0.35)
  Top 0.254: v87.95,29.84 87.15,29.84 U2.~AD12 | v18.73,32.86 17.62,32.86 7.62,42.86 SV3.2
  VDD 0.254: v87.95,29.84 87.47,30.32 82.23,30.32 v80.17,32.38
  Bottom 0.254: v80.17,32.38 79.69,32.86 v18.73,32.86
PDM_DATA  (via drill 0.35)
  Top 0.254: v89.38,27.3 88.58,27.3 88.27,26.99 87.15,26.99 U2.~AD11 | v82.77,27.88 81.88,27.88 73.03,19.02 v73.03,16.99 | v19.05,25.08 19.05,29.53 7.3,41.27 6.99,41.27 SV3.1
  Bottom 0.254: v89.38,27.3 88.27,27.3 88.11,27.15 83.5,27.15 v82.77,27.88 | v73.03,16.99 72.71,17.3 26.83,17.3 v19.05,25.08
SCL  (via drill 0.35)
  Top 0.254: v92.08,33.34 92.08,32.54 U2.D8 | v81.44,34.92 81.44,40.48 SV5.1 | v74.77,7.46 74.45,7.14 74.45,5.08 J7.21
  GND 0.254: v74.77,7.46 74.77,9.68 71.91,12.54 71.91,15.56 71.06,16.41 71.06,25.41 69.46,27.01 69.46,27.55 76.83,34.92 v81.44,34.92
  Bottom 0.254: v92.08,33.34 91.28,34.13 82.23,34.13 v81.44,34.92
SCL2  (via drill 0.35)
  Top 0.254: IC1.6 27.78,13.49 27.3,13.02 22.7,13.02 U3.P$4 22.54,12.86 21.91,12.22 13.34,12.22 12.06,13.49 12.06,18.73 12.14,18.81 | R4.1 14.22,20.32 14.22,19.56 13.56,18.89 12.22,18.89 12.14,18.81 | v86.2,33.34 87,34.13 87.31,34.13 88.11,33.34 88.11,32.54 U2.~D27 | 12.14,18.81 11.75,19.21 11.48,19.21 11.22,19.46 11.22,21.48 9.68,23.02 2.54,23.02 1.91,23.65 1.91,24.77 SV1.5
  VDD 0.254: v86.2,33.34 85.41,34.13 79.53,34.13 72.64,27.24 v71.43,27.24
  Bottom 0.254: SV1.5 4.45,26.67 5.24,25.88 70.07,25.88 v71.43,27.24
SDA  (via drill 0.35)
  Top 0.254: v94.77,30.8 94.77,31.59 U2.D9 | v79.22,32.07 79.22,40.16 SV5.2 | v73.03,16.03 73.03,9.53 73.98,8.57 73.98,5.08 J7.22
  GND 0.254: v73.03,16.03 74.91,17.92 74.97,17.92 79.22,22.16 v79.22,32.07
  Bottom 0.254: v94.77,30.8 93.66,31.91 81.6,31.91 81.28,31.59 79.69,31.59 v79.22,32.07
SDA2  (via drill 0.35)
  Top 0.254: 26.91,13.89 27.46,14.45 27.78,14.45 IC1.4 | 26.91,13.89 26.67,13.65 22.7,13.65 U3.P$3 | v69.69,15.24 69.69,17.53 82.61,30.44 U2.~D25 | v26.99,13.81 26.91,13.89 | v13.18,16.35 13.18,17.78 R2.1
  Bottom 0.254: v69.69,15.24 69.53,15.4 40.01,15.4 37.31,12.7 28.1,12.7 27.7,13.1 | v26.99,13.81 27.7,13.1 | 27.7,13.1 27.62,13.02 21.27,13.02 19.05,15.24 14.29,15.24 v13.18,16.35 6.83,22.7 1.43,22.7 1.43,29.37 SV1.3
TGT_BOOT  (via drill 0.35)
  Top 0.254: v94.14,33.34 94.14,32.54 U2.BOOT | v81.12,32.38 75.85,27.11 72.49,27.11 71.45,26.07 49.34,26.07 41.67,33.73 | 41.67,33.73 38.58,36.83 TP4.P$1 35.56,38.1 v27.46,38.1 C2.2 | v18.1,38.1 R28.2 | R13.2 42.7,21.59 42.7,30.8 41.59,31.91 41.59,33.66 41.67,33.73
  Bottom 0.254: v94.14,33.34 93.19,32.38 v81.12,32.38 | v27.46,38.1 v18.1,38.1
TGT_SWCLK  (via drill 0.35)
  Top 0.254: v92.71,26.04 92.87,26.04 96.68,29.84 96.68,31.59 U2.SWDCK | 58.5,19.61 54.29,15.4 54.13,15.4 J5.4 | 58.5,19.61 v60.01,21.11 | v33.34,25.08 TP1.P$1 | v50.32,23.02 55.09,23.02 58.5,19.61
  VDD 0.254: v92.71,26.04 91.12,24.45 91.12,22.38 v90.33,21.59
  Bottom 0.254: v90.33,21.59 89.53,20.8 87.15,20.8 86.84,21.11 v60.01,21.11 | v33.34,25.08 35.4,23.02 v50.32,23.02
TGT_SWDIO  (via drill 0.35)
  Top 0.254: U2.SWDIO 92.71,29.84 v92.55,29.69 | J5.2 v57.31,19.84 | TP2.P$1 20.32,34.61 v29.84,25.08
  VDD 0.254: v92.55,29.69 92.55,29.05 86.68,23.18 v86.68,20.32
  Bottom 0.254: v86.68,20.32 86.2,19.84 v57.31,19.84 57.15,20 34.92,20 v29.84,25.08
TGT_SWO  (via drill 0.35)
  Top 0.254: v89.38,34.92 89.22,34.77 89.22,32.54 U2.~D22
  GND 0.254: v73.98,34.13 54.61,14.76 J5.6
  Bottom 0.254: v89.38,34.92 89.06,34.61 82.71,34.61 81.6,35.72 75.56,35.72 v73.98,34.13
UART-RX  (via drill 0.35)
  Top 0.254: 91.44,40.8 92.39,41.75 96.68,41.75 97.31,41.12 97.31,37.78 97.16,37.62 96.84,37.62 95.09,35.88 95.09,35.56 96.2,34.45 96.2,32.54 U2.RXI-0 | SV3.11 32.38,41.27 33.5,41.27 36.2,43.97 v36.2,45.4 | 91.44,40.8 v90.01,40.8 | 91.44,40.8 J1.3
  Bottom 0.254: v36.2,45.4 36.35,45.56 76.2,45.56 77.63,44.13 77.63,40.8 v90.01,40.8
UART-TX  (via drill 0.35)
  Top 0.254: U2.TXO-0 93.34,32.54 93.34,38.73 93.98,39.37 J1.2 93.98,39.53 v92.55,40.96 | v35.24,45.4 SV3.12
  Bottom 0.254: v35.24,45.4 36.04,46.2 80.64,46.2 85.25,41.59 91.92,41.59 v92.55,40.96
V_BATT  (via drill 0.35)
  Top 0.254: D1.A 45.72,7.62 v41.43,3.33
  Bottom 0.254: v41.43,3.33 40.48,4.29 37.31,4.29 JP3.2 35.24,2.22 16.83,2.22 JP4.1
VDD  (via drill 0.35)
  Top 0.203: U2.VDD@36 86.71,24.94 U2.VDD@37 86.06,24.29 86.04,24.29
  Top 0.254: C22.1 62.71,16.51 66.83,12.38 66.83,10.32 U1.1 66.99,10.16 67.63,9.53 67.63,5.08 70.48,2.22 77.63,2.22 78.03,2.62 | 78.03,2.62 79.53,4.13 79.53,4.92 J7.11 | U2.VDD@37 86.36,24.45 | 90.65,10.16 90.65,12.7 C12.1 86.52,12.7 84.84,14.38 84.84,21.75 85.13,22.04 85.13,23.38 86.04,24.29 | 90.65,10.16 92.23,8.57 92.23,7.62 C8.1 | 90.65,10.16 C9.1 90.49,10.16 v89.53,9.21 | 36.35,21.59 36.35,24.13 30.16,30.32 R27.2 | R4.2 15.08,21.43 13.49,21.43 12.38,20.32 R5.2 | U3.P$6 20.48,13.65 20.32,13.65 20,13.97 20,14.61 20.48,15.08 U3.P$8 | 21.35,14.84 21.27,14.92 20.64,14.92 U3.P$8 | 21.35,14.84 21.75,14.45 22.54,14.45 U3.P$2 | 17.62,17.78 C5.1 18.26,17.78 18.26,20.32 C6.1 R4.2 | 17.62,17.78 R2.2 | 17.62,17.78 20.32,15.08 U3.P$8 | R4.2 | IC1.1 30.64,13.49 33.81,13.49 JP6.4 JP6.2 | JP1.4 JP1.2 | 82.63,3.73 83.03,4.13 83.03,4.92 J7.4 | v21.43,14.92 21.35,14.84 | 36.35,21.59 36.35,20.48 v35.08,19.21 | 36.35,21.59 R9.2 | v83.98,3.65 82.71,3.65 82.63,3.73 | v77.79,2.7 77.95,2.7 78.03,2.62 | J4.5 59.67,1.29 80.24,1.34 82.63,3.73
  VDD 0.254: v35.08,19.21 35.08,14.76 JP6.4
  Bottom 0.254: v21.43,14.92 21.75,15.24 33.02,15.24 JP6.4 | v89.53,9.21 v83.98,3.65 83.19,2.86 77.95,2.86 v77.79,2.7
  pour VDD: 0.76,46.74 0.76,0.51 100.08,0.51 100.08,46.48 0.51,46.48 0.76,46.48
VIN1
  Top 0.254: D1.C 41.75,7.62 40.96,6.83 39.05,6.83 38.26,7.62 D3.C 38.1,7.62 38.1,8.89 JP1.3 JP1.1